# Altium PCB remote.PcbDoc
Units mm, origin at the board's own origin, x right, y up, seen from the top; angles counter-clockwise.
Board outline 152.4 x 101.6 mm, 2 copper layers (Top Layer, Bottom Layer); 38 components, 52 nets, 205 pads, 40 vias.
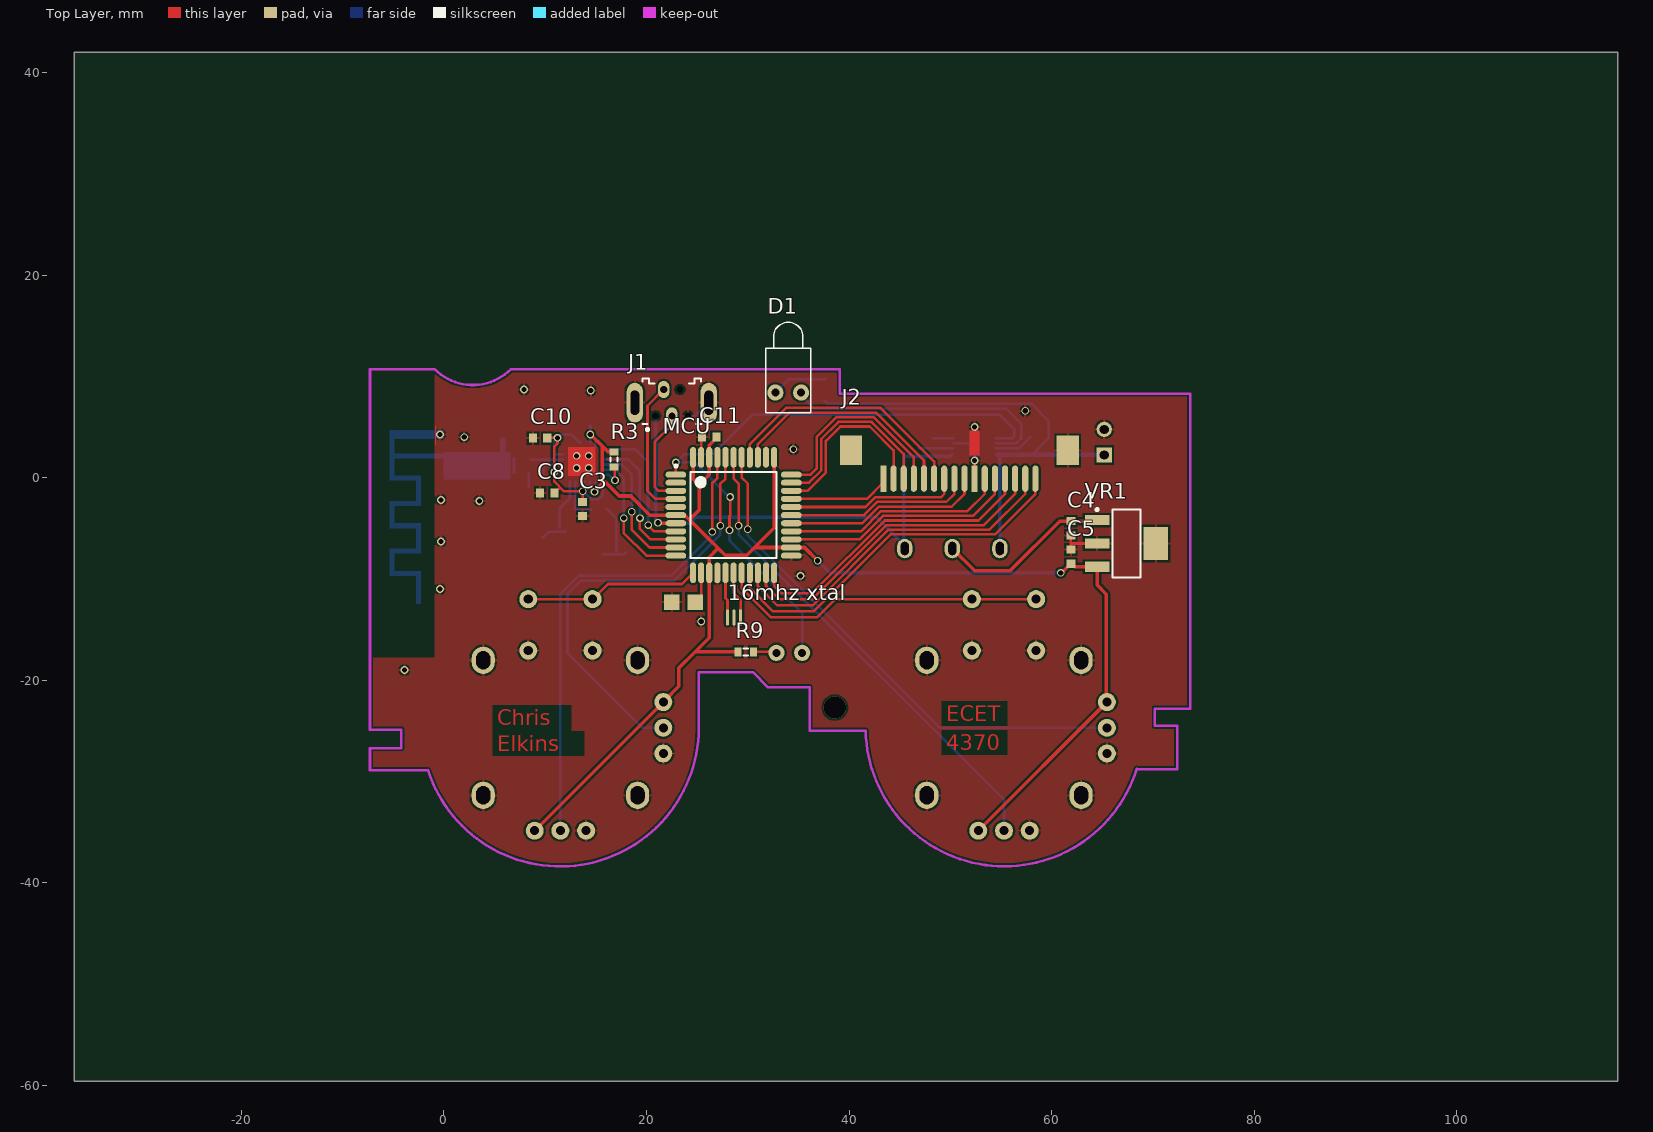
[diagram p0: Top Layer view]
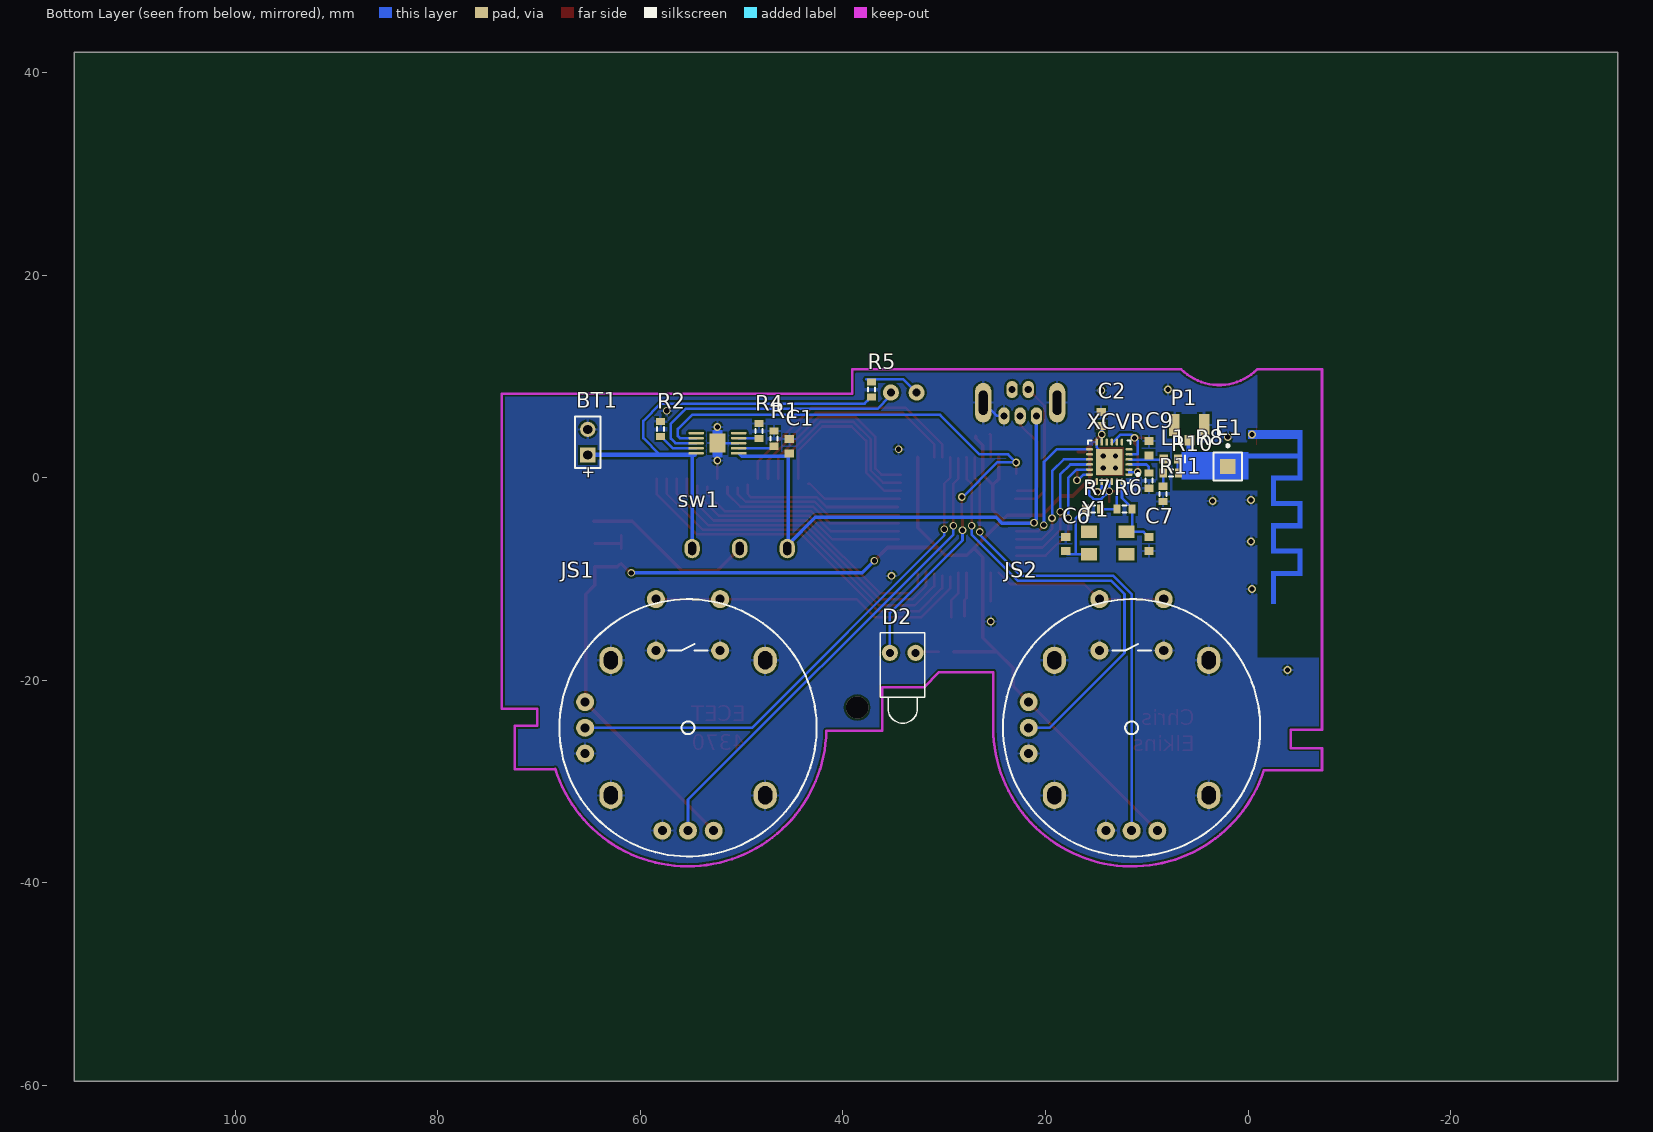
[diagram p1: Bottom Layer view, seen from below]

## Layer stack, top to bottom
Top Layer: signal copper 0.0356
Dielectric: dielectric 0.32, FR-4, Dk 4.8
Bottom Layer: signal copper 0.0356

## Board outline
-36.5,-59.6 115.9,-59.6 115.9,42 -36.5,42

## Design rules (kind name [scope] priority, off if disabled: settings)
Clearance [All] p1: gap=0.2
PolygonConnect [All] p1: connectstyle=Relief reliefconductorwidth=0.254 reliefentries=4 polygonreliefangle="90 Angle"
RoomDefinition U_power [InComponentClass('U_power')] p1: confinementstyle=ConfineOut formatcopy=TRUE lockcomponents=FALSE outline 182.6,31.5 118.4,31.5 118.4,47.1 182.6,47.1
RoomDefinition U_joysticks [InComponentClass('U_joysticks')] p2: confinementstyle=ConfineOut formatcopy=TRUE lockcomponents=FALSE outline -96.8,-37.4 -44.2,-37.4 -44.2,-11.5 -96.8,-11.5
RoomDefinition U_xcvr [InComponentClass('U_xcvr')] p3: confinementstyle=ConfineOut formatcopy=TRUE lockcomponents=FALSE outline 205.9,19.7 119.401,19.7 119.401,27.6 205.9,27.6
RoomDefinition U_mcu [InComponentClass('U_mcu')] p4: confinementstyle=ConfineOut formatcopy=TRUE lockcomponents=FALSE outline 165.7,-32.6 211.3,-32.6 211.3,-15.2 165.7,-15.2
RoomDefinition U_connectors [InComponentClass('U_connectors')] p5: confinementstyle=ConfineOut formatcopy=TRUE lockcomponents=FALSE outline 132.2,-62.6 147.2,-62.6 147.2,-35.9 132.2,-35.9
RoutingVias [All] p1: holewidth=0.711 width=1.27 viastyle="Through Hole" minholewidth=0.711 minwidth=1.27 maxholewidth=0.711 maxwidth=1.27
SilkscreenOverComponentPads [All] p1: minsilkscreentomaskgap=0.254
SolderMaskExpansion [All] p1: expansion=0.102
Width [All] p1: maxlimit=5 minlimit=0.254 preferedwidth=0.254
27 further rules are at their usual default settings.

## Classes and differential pairs
component class U_connectors: J1 J2
component class U_mcu: "16mhz xtal" C11 D2 MCU R9
component class U_power: BT1 C1 C4 C5 chg1 D1 R1 R2 R4 R5 sw1 VR1
component class U_xcvr: C2 C3 C6 C7 C8 C9 C10 E1 L1 P1 R3 R6 R7 R8 R10 R11 XCVR Y1
component class U_joysticks: JS1 JS2 JS?

## Components (designator, comment, footprint, x,y, rotation, side; value= is the part's Value field where it differs from the comment)
"16mhz xtal" "NCSTCE16M0V53-R0" OSC 29.3,-13.8 r180 top
BT1 "Battery" BAT-2 65.2,3.5 r90 bottom
C1 "Cap Semi" CAPC1608L 45.3,3.1 r270 bottom
C2 "Cap Semi" CAPC1608L 14.5,5.8 r270 bottom
C3 "Cap Semi" CAPC1608L 13.7,-3.1 r90 top
C4 "Cap Semi" CAPC1608L 61.9,-5 r90 top
C5 "Cap Semi" CAPC1608L 61.9,-7.8 r270 top
C6 "Cap Semi" CAPC1608L 18,-6.55 r270 bottom
C7 "Cap Semi" CAPC1608L 9.8,-6.55 r90 bottom
C8 "Cap Semi" CAPC1608L 10.2,-1.5 r0 top
C9 "Cap Semi" CAPC1608L 9.8,2.9 r90 bottom
C10 "Cap Semi" CAPC1608L 9.5,3.9 r180 top
C11 "Cap Semi" CAPC1608L 26.2,4 r180 top
D1 "LED1" LED-1 34,8.4 r90 top
D2 "LED1" LED-1 34.1,-17.3 r270 bottom
E1 "Antenna" PIN1 2,1.1 r180 bottom
J1 "5000750517" 5000750517 22.5,7.4 r0 top
J2 "flat flex connector" "flex con" 43.1,-1.4 r0 top
JS1 "joystick" Joystick 55.3,-24.7 r180 bottom
JS2 "joystick" Joystick 11.5,-24.7 r180 bottom
L1 "Inductor" INDC1608L 7.62,1.85 r0 bottom
MCU "ATMega32u4" TQFP44_M 28.6,-3.7 r0 top
P1 "u.fl" "U.FL connector" 5.8,5.2 r180 bottom
R1 "Res3" RESC1608L 46.8,3.85 r270 bottom
R2 "Res3" RESC1608L 58,4.8 r270 bottom
R3 "Res3" RESC1608L 16.8,1.8 r90 top
R4 "Res3" RESC1608L 48.3,4.6 r270 bottom
R5 "Res3" RESC1608L 37.2,8.7 r270 bottom
R6 "Res3" RESC1608L 12.2,-3.1 r180 bottom
R7 "Res3" RESC1608L 15.3,-3.1 r180 bottom
R8 "Res3" RESC1608L 9.8,-0.3 r90 bottom
R9 "Res3" RESC1608L 29.8,-17.2 r0 top
R10 "Res3" RESC1608L 7.62,0.45 r180 bottom
R11 "Res3" RESC1608L 8.4,-1.6 r270 bottom
sw1 "switch" switch 50.2,-7 r90 bottom
VR1 "NCP1117ST33T3G" SOT223-4N 67.4,-6.5 r0 top
XCVR "CYRF8935" QFN50P400X400-24VAL 13.7,1.55 r0 bottom
Y1 "XTAL" PCBComponent_1 15.7,-7.55 r180 bottom

## Footprints (in the part's own frame and the unit in brackets; to place one, negate y for a bottom-side part, rotate by r counter-clockwise, add the part's x,y. Pads: shape width x height; smd on the part's side, far side on the other; paste and mask are expansions set on the pad)
5000750517 [mm] "Connector; USB Mini-B, Type 2, Thru-Hole; 5 Position; Vertical"
  round 0.4 / inner round 0.4 / far side oval 1.1x1.7 hole 0.7: 1(-1.6,-1.3) 4(0.8,1.3) 5(1.6,-1.3)
  oval 1.1x1.7 / inner round 0.4 / far side oval 1.1x1.7 hole 0.7: 2(-0.8,1.3) 3(0,-1.3)
  oval 1.6x3.9 / inner oval 0.55x2.1 / far side oval 1.6x3.9 hole 0.85 slot 2.4 at 90 deg: 6(3.65,0) 7(-3.65,0)
  silkscreen extent -2.91,-2.77 2.91,2.4, body extent -3.85,-2.1 3.85,2.4, height 7.7
BAT-2 [mm] "Multicell Battery; 2 Leads"
  rect 1.5x1.5 hole 0.9: 1(-1.27,0)
  round 1.5 hole 0.9: 2(1.27,0)
  silkscreen extent -2.54,-1.27 2.54,1.27
CAPC1608L [mm] "Chip Capacitor, Body 1.6x0.8mm, IPC High Density"
  rect 0.8x0.9 smd: 1(-0.7,0) 2(0.7,0)
  body extent -0.87,-0.48 0.87,0.48, height 1.3
"flex con" [mm]
  rect 2.2x2.9 smd: 0(-2.9,4.1) 0(18.5,4.1)
  rect 0.6x2.6 smd: 1(0.3,1.3) 10(9.3,1.3)
  oval 0.6x2.6 smd: 2(1.3,1.3) 3(2.3,1.3) 4(3.3,1.3) 5(4.3,1.3) 6(5.3,1.3) 7(6.3,1.3) 8(7.3,1.3) 9(8.3,1.3) 11(10.3,1.3) 12(11.3,1.3) 13(12.3,1.3) 14(13.3,1.3) 15(14.3,1.3) 16(15.3,1.3)
INDC1608L [mm] "Chip Inductor, Body 1.6x0.8mm, IPC High Density"
  rect 0.8x0.9 smd: 1(-0.7,0) 2(0.7,0)
  silkscreen extent -1.4,-0.35 -1.4,0.35, body extent -0.87,-0.48 0.87,0.48, height 0.55
Joystick [mil]
  round 70 hole 35.43: B1A(-125,500) B1B(125,500) B2A(-125,300) B2B(125,300)
  round 70 hole 35: H1(-100,-400) H2(0,-400) H3(100,-400) V1(-400,100) V2(-400,0) V3(-400,-100)
  oval 90x105.75 hole 55 slot 70.87 at 90 deg: MOUNT1(-300,262.5) MOUNT2(-300,-262.5) MOUNT3(300,-262.5) MOUNT4(300,262.5)
  silkscreen extent -500,-500 500,500
LED-1 [mm] "Typical RED GaAs LED; 2 Leads"
  round 1.6 hole 0.8: 1(0,1.27) 2(0,-1.27)
  silkscreen extent -2,-2.2 6.95,2.2
OSC [mm]
  rect 0.3x1.6 smd: 1(0,0)
  oval 0.3x1.6 smd: 2(0.65,0) 3(1.3,0)
PCBComponent_1 [mm]
  rect 1.6x1.25 smd: 1(0,0) 2(3.7,2.2) 3(0,2.2) 3(3.7,0)
PIN1 [mm] "Generic Antenna; 1 Lead"
  rect 1.5x1.5 smd paste-10: 1(0,0)
  silkscreen extent -1.4,-1.4 1.4,2.17
QFN50P400X400-24VAL [mm] "24-Pin Plastic Quad Flat No-Lead 0.5 mm Pitch"
  oval 0.7x0.25 smd: 1(-1.95,1.25) 2(-1.95,0.75) 3(-1.95,0.25) 4(-1.95,-0.25) 5(-1.95,-0.75) 6(-1.95,-1.25) 13(1.95,-1.25) 14(1.95,-0.75) 15(1.95,-0.25) 16(1.95,0.25) 17(1.95,0.75) 18(1.95,1.25)
  oval 0.25x0.7 smd: 7(-1.25,-1.95) 8(-0.75,-1.95) 9(-0.25,-1.95) 10(0.25,-1.95) 11(0.75,-1.95) 12(1.25,-1.95) 19(1.25,1.95) 20(0.75,1.95) 21(0.25,1.95) 22(-0.25,1.95) 23(-0.75,1.95) 24(-1.25,1.95)
  rect 2.6x2.6 smd: 25(0,0)
  silkscreen extent -2.97,-2.1 2.1,2.1, body extent -2.07,-2.07 2.07,2.07, height 1
RESC1608L [mm] "Chip Resistor, Body 1.6x0.8mm, IPC High Density"
  rect 0.7x0.9 smd: 1(-0.75,0) 2(0.75,0)
  silkscreen extent -0.2,-0.35 0.2,0.35, body extent -0.85,-0.48 0.85,0.48, height 0.9
SOT223-4N [mm] "SOT223, 4-Leads, Body 6.5x3.5mm, Pitch 2.3mm, Lead Span 7mm, IPC Medium Density"
  rect 2.4x1 smd: 1(-2.9,2.3) 2(-2.9,0) 3(-2.9,-2.3)
  rect 2.4x3.3 smd: 4(2.9,0)
  silkscreen extent -3.02,-3.35 1.4,3.47, body extent -1.85,-3.35 1.85,3.35, height 1.7
switch [mil]
  oval 75.75x60 hole 30.79 slot 51.18 at 0 deg: 1(0,185.04) 2(0,0) 3(0,-185.04)
  body extent -130,-250 130,250, height 309
TQFP44_M [mm] "Thin QFP, 44-Leads, Body 10x10mm, Pitch 0.8mm, IPC Low Density"
  oval 2.05x0.6 smd: 1(-5.7,4) 2(-5.7,3.2) 3(-5.7,2.4) 4(-5.7,1.6) 5(-5.7,0.8) 6(-5.7,0) 7(-5.7,-0.8) 8(-5.7,-1.6) 9(-5.7,-2.4) 10(-5.7,-3.2) 11(-5.7,-4) 23(5.7,-4) 24(5.7,-3.2) 25(5.7,-2.4) 26(5.7,-1.6) 27(5.7,-0.8) 28(5.7,0) 29(5.7,0.8) 30(5.7,1.6) 31(5.7,2.4) 32(5.7,3.2) 33(5.7,4)
  oval 0.6x2.05 smd: 12(-4,-5.7) 13(-3.2,-5.7) 14(-2.4,-5.7) 15(-1.6,-5.7) 16(-0.8,-5.7) 17(0,-5.7) 18(0.8,-5.7) 19(1.6,-5.7) 20(2.4,-5.7) 21(3.2,-5.7) 22(4,-5.7) 34(4,5.7) 35(3.2,5.7) 36(2.4,5.7) 37(1.6,5.7) 38(0.8,5.7) 39(0,5.7) 40(-0.8,5.7) 41(-1.6,5.7) 42(-2.4,5.7) 43(-3.2,5.7) 44(-4,5.7)
  silkscreen extent -5.82,-4.25 4.25,4.97, body extent -5,-5 5,5, height 1.6
"U.FL connector" [mm] "u.fl smd connector"
  rect 1x1.05 smd: 1(0,-1.525)
  rect 1.05x2.2 smd: 2(-1.475,0) 2(1.475,0)

## Part data
BT1: "Multicell Battery"
C1 C2 C3 C4 C5 C6 C7 C8 C9 C10 C11: "Capacitor (Semiconductor SIM Model)"
D1 D2: "Typical RED GaAs LED"
E1: "Generic Antenna"
J1: "USB On-The-Go (OTG) Mini-B Receptacle, Right Angle, Thru-Hole, 0.80mm (.031\") Pitch, Solder Tails & Shell Tabs with Dimples"
MCU: "usb enabled avr microcontroller"
P1: library part BNC, "BNC Elbow Connector"
R1 R2 R3 R4 R5 R6 R7 R8 R9 R10 R11: "Resistor"
VR1: library part "Volt Reg", "Voltage Regulator"
Y1: "Crystal Oscillator"

## Free pads (board coordinates)
  rect 1.524x1.524 smd: 0(24.8,-12.3) 1(22.5,-12.3)
  rect 1.57x1.88 smd far side: 0(52.4,3.4)
  rect 1.55x0.25 smd far side: 1(50.3,2.4)
  oval 1.55x0.25 smd far side: 2(50.3,2.9) 3(50.3,3.4) 4(50.3,3.9) 5(50.3,4.4) 6(54.5,4.4) 7(54.5,3.9) 8(54.5,3.4) 9(54.5,2.9) 10(54.5,2.4)

## Via types
v1: diameter 0.762, hole 0.508, Top Layer to Bottom Layer, 35 vias
v2: diameter 0.762, hole 0.508, Top Layer to Bottom Layer, tented top, 4 vias
v3: diameter 2.2, hole 2.2, Top Layer to Bottom Layer, 1 vias

## Nets (pads, with @x,y where several pads share a name; then routed paths per layer and width w, separated by ;. In a path a pad name is that pad's centre, name@x,y a point inside that pad or via, vN(x,y) a via of type N, cw(c..) or ccw(c..) an arc to the next point about the centre after c; other vN are vias at no path point)
GND: "16mhz xtal.2" BT1.2 C1.1 C2.1 C3.1 C4.1 C5.1 C6.1 C7.1 C8.1 C9.2 C10.2 C11.2 J1.5 J1.6 J1.7 J2.0@61.6,2.7 J2.10 JS1.B2A JS1.B2B JS1.H1 JS1.MOUNT1 JS1.MOUNT2 JS1.MOUNT3 JS1.MOUNT4 JS1.V3 JS2.B2A JS2.B2B JS2.H1 JS2.MOUNT1 JS2.MOUNT2 JS2.MOUNT3 JS2.MOUNT4 JS2.V3 MCU.5 MCU.15 MCU.23 MCU.35 MCU.43 P1.2 pad.0@52.4,3.4 pad.1@22.5,-12.3 pad.3 R1.1 R2.1 R4.1 R8.1 R11.2 VR1.2 VR1.4 XCVR.12 XCVR.25 | length 13.4
  Top Layer w0.254: MCU.43 25.4,4.2 C11.2@25.5,4.3 ; J2.10 v1(52.4,1.7) ; C5.1@61.9,-7 C4.1 ; 61.9,-6.5 VR1.2
  Bottom Layer w0.254: XCVR.25@14.65,2.7 14.95,3 XCVR.12 ; J1.5 24.8,6.1 J1.6@26.1,7.4 ; pad.3 pad.0@52.2,3.4
  other v1: -3.9,-19 25.4,-14.2 -0.4,-11 35.2,-9.7 -0.3,-6.3 3.5,-2.3 -0.3,-2.2 34.5,2.8 2,4 -0.39,4.25 52.4,5 57.4,6.6 14.5,8.6 7.9,8.7
  other v2: 13.1,0.95 14.3,0.95 13.1,2.15 14.3,2.15
"Net16mhz xtal_1": "16mhz xtal.1" MCU.17 | length 4.7
  Top Layer w0.254: MCU.17 28.6,-11.4 29.3,-12.1 29.3,-13.8
"Net16mhz xtal_3": "16mhz xtal.3" MCU.16 | length 4.4
  Top Layer w0.254: MCU.16 27.8,-11.9 28,-12.1 28,-13.7
NetC4_2: C4.2 sw1.2 VR1.1 | length 17.3
  Top Layer w0.354: sw1.2 52.4,-9.2 55.9,-9.2 60.8,-4.3 C4.2 VR1.1@64.6,-4.3
NetC6_2: C6.2 R7.1 Y1.1 | length 7.2
  Bottom Layer w0.254: Y1.1 17,-7.55 ; R7.1@16.1,-3.1 17,-4 17,-7.55 ; C6.2@18,-7.4 17.85,-7.55 17,-7.55
NetC7_2: C7.2 R6.2 XCVR.24 Y1.2 | length 7.3
  Bottom Layer w0.254: C7.2@9.77,-5.9 10.32,-5.35 Y1.2 ; Y1.2@11.45,-4.95 R6.2 ; R6.2@11.45,-3 12.45,-2 XCVR.24
NetC9_1: C9.1 L1.2 XCVR.4 | length 3.2
  Bottom Layer w0.254: L1.2@8.567,1.783 11.733,1.783 XCVR.4
Netchg1_2: pad.2 R1.2 | length 3.4
  Bottom Layer w0.254: R1.2@46.9,2.9 pad.2
Netchg1_4: pad.4 R4.2 | length 2
  Bottom Layer w0.254: R4.2@48.3,3.9 pad.4
Netchg1_7: D2.2 MCU.1 pad.7 | length 64.7
  Top Layer w0.254: MCU.1@22.9,0.4 v1(22.9,1.5) ; v1(28.2,-5.2) 28.2,-3.8 28.26,-3.74 v1(28.26,-1.92)
  Bottom Layer w0.254: v1(22.9,1.5) 24.77,1.5 28.26,-1.99 v1(28.26,-1.92) ; v1@23,1.6 23.7,2.3 26.5,2.3 30.4,6.2 54.9,6.2 56.3,4.8 56.3,4.1 56.1,3.9 pad.7 ; v1(28.2,-5.2) 28.2,-6.19 35.37,-13.36 D2.2
Netchg1_8: D1.2 pad.8 | length 26.9
  Bottom Layer w0.254: D1.2@35.4,8 36.6,6.8 55.538,6.8 57,5.338 57,3.854 56.546,3.4 pad.8
Netchg1_9: pad.9 R2.2 | length 3.9
  Bottom Layer w0.254: pad.9 56.8,2.9 R2.2@57.9,4
NetD1_1: D1.1 R5.1 | length 5.5
  Bottom Layer w0.254: D1.1 34.03,9.7 37.7,9.7
NetD2_1: D2.1 R9.2 | length 2.3
  Top Layer w0.254: R9.2 D2.1@32.8,-17.2
NetE1_1: E1.1 L1.1 P1.1 R10.2 | length 3.2
  Bottom Layer w0.254: R10.2@6.92,0.5 L1.1
  Bottom Layer w0.554: 5.8,1.8 P1.1
NetJ1_2: J1.2 MCU.4 | length 13.9
  Top Layer w0.254: J1.2 20.1,7.1 20.1,-1.3 20.9,-2.1 MCU.4@23,-2.1
NetJ1_3: J1.3 MCU.3 | length 9.9
  Top Layer w0.254: J1.3 22.5,5.2 20.8,3.5 20.8,-0.9 21.2,-1.3 MCU.3@22.8,-1.3
NetJ2_1: J2.1 MCU.30 | length 9.6
  Top Layer w0.254: MCU.30@34.4,-2.1 41.781,-2.1 43.281,-0.6 J2.1@43.4,-0.6
NetJ2_2: J2.2 MCU.31 | length 18.3
  Top Layer w0.254: MCU.31 35.893,-1.3 37.714,0.521 37.714,3.621 39.147,5.053 42.047,5.053 44.4,2.7 J2.2
NetJ2_3: J2.3 MCU.32 | length 19.2
  Top Layer w0.254: MCU.32 36.047,-0.5 37.257,0.711 37.257,3.811 38.957,5.511 42.236,5.511 45.4,2.347 J2.3
NetJ2_4: J2.4 MCU.33 | length 20
  Top Layer w0.254: MCU.33 36.2,0.3 36.8,0.9 36.8,4 38.768,5.968 42.425,5.968 46.4,1.993 J2.4
NetJ2_5: J2.5 MCU.36 | length 22.8
  Top Layer w0.254: MCU.36 31,3.3 34.125,6.425 42.675,6.425 47.4,1.7 J2.5
NetJ2_6: J2.6 MCU.37 | length 24.9
  Top Layer w0.254: MCU.37 30.2,3.3 33.782,6.882 43.118,6.882 48.4,1.6 J2.6
NetJ2_7: J2.7 MCU.29 | length 16.2
  Top Layer w0.254: MCU.29@34.6,-2.9 41.627,-2.9 42.585,-1.942 49.058,-1.942 49.4,-1.6 J2.7@49.4,-0.7
NetJ2_8: J2.8 MCU.28 | length 17.4
  Top Layer w0.254: MCU.28@34.5,-3.7 41.474,-3.7 42.774,-2.4 49.6,-2.4 50.4,-1.6 J2.8@50.4,-1
NetJ2_9: J2.9 MCU.27 | length 18.8
  Top Layer w0.254: MCU.27@34.5,-4.5 41.321,-4.5 42.964,-2.857 50.143,-2.857 51.4,-1.6 J2.9@51.4,-0.9
NetJ2_11: J2.11 MCU.26 | length 21.1
  Top Layer w0.254: MCU.26@34.5,-5.3 41.167,-5.3 43.153,-3.314 51.686,-3.314 53.4,-1.6 J2.11@53.4,-0.9
NetJ2_12: J2.12 MCU.25 | length 22.6
  Top Layer w0.254: MCU.25@34.5,-6.1 41.014,-6.1 43.342,-3.771 52.229,-3.771 54.4,-1.6 J2.12@54.4,-0.8
NetJ2_13: J2.13 MCU.22 | length 29.8
  Top Layer w0.254: MCU.22@32.6,-9.5 32.6,-10.7 33.3,-11.4 36.36,-11.4 43.532,-4.228 52.772,-4.228 55.4,-1.6 J2.13
NetJ2_14: J2.14 MCU.21 | length 32.3
  Top Layer w0.254: MCU.21@31.8,-9.3 31.8,-10.7 33.1,-12 36.407,-12 43.721,-4.686 53.314,-4.686 56.4,-1.6 ; 56.4,-1.6 J2.14
NetJ2_15: J2.15 MCU.20 | length 34.4
  Top Layer w0.254: MCU.20@31,-9.5 31,-10.7 32.9,-12.6 36.453,-12.6 43.911,-5.143 53.857,-5.143 57.4,-1.6 J2.15
NetJ2_16: J2.16 MCU.19 | length 36.7
  Top Layer w0.254: MCU.19@30.2,-9.7 30.2,-10.9 32.5,-13.2 36.5,-13.2 44.1,-5.6 54.4,-5.6 58.4,-1.6 J2.16
NetJS1_B1A: JS1.B1A JS1.B1B MCU.18 | length 32.1
  Top Layer w0.254: MCU.18@29.4,-9.8 29.4,-10.9 32.3,-13.8 36.847,-13.8 38.647,-12 JS1.B1B@52.1,-12 ; JS1.B1B JS1.B1A JS1.B1A@58.5,-12
NetJS1_H2: JS1.H2 MCU.39 | length 47.9
  Top Layer w0.254: MCU.39@28.6,1.9 28.6,-0.1 29.1,-0.6 v1@29.1,-4.73
  Bottom Layer w0.254: v1@29.1,-4.73 29.1,-5.6 55.3,-31.8 JS1.H2 JS1.H2@55.3,-34.9
  other v1: 29.1,-4.75
NetJS1_V2: JS1.V2 MCU.38 | length 51.3
  Top Layer w0.254: MCU.38 29.4,0 30,-0.6 v1@30,-5.2
  Bottom Layer w0.254: v1@30,-5.29 30,-5.7 49,-24.7 49.3,-24.7 ; 49.2,-24.7 49.3,-24.7 ; JS1.V2 52.1,-24.7 49.3,-24.7
  other v1: 30,-5.1
NetJS2_B1A: JS2.B1A JS2.B1B MCU.12 | length 17.4
  Top Layer w0.254: JS2.B1B JS2.B1A 14.7,-12 16.2,-10.5 23.5,-10.5 MCU.12
NetJS2_H2: JS2.H2 MCU.41 | length 48.7
  Top Layer w0.254: v1@26.5,-5.11 26.5,-0.52 27,-0.02 MCU.41
  Bottom Layer w0.254: JS2.H2@11.5,-34.6 11.5,-11.5 13.3,-9.7 22.4,-9.7 26.5,-5.6 26.5,-5.1 26.44,-5.16 26.44,-5.25 26.5,-5.31 v1(26.5,-5.35)
NetJS2_V2: JS2.V2 MCU.40 | length 43.8
  Top Layer w0.254: v1@27.3,-4.76 27.3,-0.6 27.78,-0.12 27.78,1.98 MCU.40
  Bottom Layer w0.254: 17.9,-10.2 17.8,-10.2 ; JS2.V2 19.6,-24.7 12.2,-17.3 12.2,-11.5 13.5,-10.2 17.8,-10.2 ; v1(27.295,-4.745) 27.3,-4.75 27.3,-5.6 22.7,-10.2 17.8,-10.2
NetMCU_8: MCU.8 XCVR.13 | length 14.3
  Top Layer w0.254: v1@20.15,-4.7 20.75,-5.3 MCU.8
  Bottom Layer w0.254: XCVR.13 18.9,2.8 20.15,1.55 v1@20.15,-4.69
  other v1: 20.17,-4.69
NetMCU_9: MCU.9 XCVR.15 | length 13.9
  Top Layer w0.254: v1(19.35,-4) 19.35,-5.05 20.4,-6.1 MCU.9
  Bottom Layer w0.254: XCVR.15 18.2,1.8 19.35,0.65 v1(19.35,-4)
NetMCU_10: MCU.10 XCVR.16 | length 13.8
  Top Layer w0.254: v1(18.55,-3.37) 18.55,-5.15 20.3,-6.9 MCU.10
  Bottom Layer w0.254: XCVR.16 17.55,1.3 18.55,0.3 v1@18.55,-3.38
NetMCU_11: MCU.11 XCVR.17 | length 14
  Top Layer w0.254: v1(17.75,-4) 17.75,-5.45 20,-7.7 MCU.11
  Bottom Layer w0.254: XCVR.17 16.95,0.8 17.75,0 v1(17.75,-4)
NetR3_1: R3.1 XCVR.18 | length 2.2
  Top Layer w0.254: v1@16.88,0.01 R3.1@16.88,0.81
  Bottom Layer w0.254: XCVR.18 16.27,0.3 v1@16.83,-0.26
  other v1: 16.88,-0.26
NetR6_1: R6.1 R7.2 XCVR.23 | length 4.3
  Bottom Layer w0.254: R6.1@12.9,-3.1 R6.1 ; XCVR.23 R6.1 ; R7.2 R6.1
NetR8_2: R8.2 XCVR.3 | length 2.7
  Bottom Layer w0.254: R8.2@9.8,0.4 9.8,1.05 10.05,1.3 XCVR.3
NetR10_1: R10.1 R11.1 | length 1.3
  Bottom Layer w0.254: R11.1@8.37,-0.9 R10.1
NewNet1: MCU.13 pad.0@24.8,-12.3 | length 2.8
  Top Layer w0.254: pad.0@25.4,-12.2 MCU.13
NewNet2: 
VBAT: BT1.1 pad.10 R5.2 sw1.1 | length 46.9
  Bottom Layer w0.254: R5.2@37.56,7.61 37.87,7.3 58,7.3 59.7,5.6 59.7,3.9 58.1,2.3 ; 54.627,2.273 54.9,2
  Bottom Layer w0.354: sw1.1 54.9,2
  Bottom Layer w0.454: 54.627,2.273 BT1.1@65.2,2.273
VCC: C2.2 C5.2 C11.1 JS1.H3 JS1.V1 JS2.H3 JS2.V1 MCU.6 MCU.14 MCU.24 MCU.34 MCU.42 MCU.44 R3.2 R9.1 VR1.3 XCVR.11 XCVR.20 | length 156.7
  Top Layer w0.354: JS2.H3 JS2.V1@21.6,-22.22 ; v1@14.5,4.25 15.65,3.1 ; v1@14.88,-1.35 15.65,-0.58 15.65,3.1 ; 15.65,-0.15 17.31,-1.81 18.44,-1.81 20.33,-3.7 MCU.6 23.782,-3.7 24.302,-4.22 24.302,-4.222 25.742,-5.662 25.742,-5.664 26.186,-6.108 26.198,-6.108 27.07,-6.98 ; R3.2@16.75,2.55 16.2,2.55 15.65,3.1 ; JS2.V1@21.8,-22 23.2,-20.6 23.2,-19.4 23.2,-18.8 24.8,-17.2 ; 24.3,-4.1 25.2,-3.2 25.2,-0.7 ; MCU.44 24.6,-0.1 25.2,-0.7 ; MCU.14 26.2,-15.8 24.8,-17.2 ; MCU.14@26.2,-9.3 26.2,-7.85 27,-7.05 27,-7.06 ; C11.1@26.9,4.1 26.9,3.9 26.2,3.2 MCU.42 26.2,0.3 25.2,-0.7 ; 27.11,-7.01 27.77,-7.67 29.89,-7.67 ; R9.1 24.8,-17.2 ; 29.9,-7.67 29.89,-7.67 ; MCU.34 32.6,-4.96 30.68,-6.88 ; MCU.24 35.6,-6.9 v1(36.9,-8.2) ; MCU.24@34.5,-6.9 30.7,-6.9 30.68,-6.88 ; JS1.H3 JS1.V1@65.42,-22.2 ; v1@61,-9.4 C5.2 ; C5.2@62.1,-8.6 62.3,-8.8 VR1.3 64.5,-10.6 65.4,-11.5 JS1.V1@65.4,-22 ; 29.89,-7.67 30.68,-6.88
  Bottom Layer w0.254: XCVR.20 14.45,-1.03 v1@14.88,-1.46 ; XCVR.11 v1(14.45,4.25)
  Bottom Layer w0.354: v1(14.45,4.25) C2.2@14.45,5.05 ; v1(36.9,-8.2) 38.1,-9.4 v1(60.9,-9.4)
  other v1: 14.86,-1.4
VDD: C3.2 C8.2 C10.1 XCVR.1 XCVR.2 XCVR.5 XCVR.8 XCVR.9 XCVR.19 XCVR.21 XCVR.22 | length 22.7
  Top Layer w0.254: C10.1@10.31,3.94 10.32,3.93 v1(11.21,3.93) ; C8.2 10.95,-1.5 11.46,-0.99 ; v1@11.2,3.91 11.21,3.9 11.21,3.37 10.9,3.06 10.9,2.29 ; C3.2@13.7,-2.37 v1(13.7,-1.35) 11.85,-1.35 10.9,-0.4 v1(10.9,0.55) 10.9,2.29 ; 10.9,2.29 10.9,2.3 10.89,2.3 10.9,2.29
  Bottom Layer w0.254: v1(10.9,0.55) 11.5,0.55 XCVR.2 ; 10.9,2.3 10.9,3.65 11.5,4.25 12.6,4.25 13.4,3.45 XCVR.9 ; 10.95,2.3 XCVR.5 ; XCVR.1 XCVR.2@11.75,0.75 ; v1@13.768,-1.35 v1@13.718,-1.35 ; XCVR.21 13.452,-0.4 13.7,-0.648 v1(13.7,-1.35) v1@13.718,-1.35 ; XCVR.19@14.95,-0.479 15.25,-0.779 15.7,-1.229 15.7,-1.709 15.279,-2.13 14.498,-2.13 v1@13.718,-1.35
VUSB: C1.2 J1.1 MCU.7 pad.1@50.3,2.4 sw1.3 | length 56.5
  Top Layer w0.354: v1(21.132,-4.458) 21.132,-4.332 21.3,-4.5 23.73,-4.5 23.748,-4.5 MCU.7
  Bottom Layer w0.354: J1.1 20.9,-4.1 v1@21.3,-4.5 ; pad.1@50.2,2.3 50,2.1 45.4,2.1 45.4,-6.6 42.722,-3.922 24.878,-3.922 24.3,-4.5 ; v1@21.3,-4.5 24.3,-4.5 ; v1@21.3,-4.5 23.73,-4.5 24.3,-4.5
pads on no net: J1.4 J2.0@40.2,2.7 MCU.2 XCVR.6 XCVR.7 XCVR.10 XCVR.14 Y1.3
copper on no net:
  other v3: 38.6,-22.7

## Polygon pours and split planes (outlines as drawn)
GND on Bottom Layer "Top Layer-No Net" (solid, remove dead copper, pour order 1000): -7.9,11.4 -7.4,10.9 76.6,10.9 76.6,-31.5 61.7,-46.4 59.1,-43.8 -9.5,-43.8
GND on Bottom Layer "Top Layer-No Net" (solid, remove dead copper, pour order 1001): 54.9,8.7 54.9,4.4 55.2,4.1 55.4,3.9 60.9,3.9 60.9,9.2 61.1,9.4
GND on Top Layer "Top Layer-No Net" (solid, remove dead copper, pour order 1005): -11.69,14.28 80.02,14.28 82.39,11.91 82.61,11.69 82.61,-41.35 -15.99,-41.35 -16.67,-40.67

## Keep-outs
Keep-Out Layer:
  lines w0.254: -1.6,-28.9 -7.3,-28.9 -7.3,-26.7 -4.2,-26.7 -4.2,-24.9 -7.3,-24.9 -7.3,10.7 -0.9,10.7 ccw(c2.85,14.45) 6.6,10.7 39.1,10.7 39.1,8.3 73.7,8.3 73.7,-22.8 70.2,-22.8 70.2,-24.5 72.4,-24.5 72.4,-28.8 68.4,-28.8 ; -1.565,-28.905 ccw(c11.465,-24.693) 25.158,-24.72 ; 25.15,-24.7 25.15,-19.2 30.5,-19.2 32,-20.7 36.1,-20.7 36.1,-25 41.6,-25 ; 41.64,-24.999 ccw(c55.329,-24.688) 68.406,-28.75

## Other copper
Top Layer:
  rectangle net GND: 51.9,2.19 52.9,4.66
  rectangle net GND: 12.24,0.17 14.97,3.03
  rectangle net GND: -0.9,3.2 -0.77,5.17
  pour cut-out: 32.63,1.31 32.72,1.31 33.72,0.31 33.63,0.22 33.63,-7.7 32.62,-8.71 32.61,-8.7 24.53,-8.7 23.56,-7.73 23.57,-7.72 23.57,0.4 23.6,0.4 24.54,1.34
  text "ECET" at 49.59,-24.06 h1.52
  text "Chris" at 5.28,-24.47 h1.52
  text "4370" at 49.59,-26.93 h1.52
  text "Elkins" at 5.28,-27 h1.52
Bottom Layer:
  rectangle net GND: 51.88,2.01 52.9,4.69
  region net NetE1_1: -2.76,-9.48 -2.76,-12.46 -2.26,-12.46 -2.26,-9.48
  region net NetE1_1: -5.13,-9.2 -5.13,-9.7 -2.26,-9.7 -2.26,-9.2
  region net NetE1_1: -5.11,2.4 -5.11,1.9 0,1.9 0,2.4
  region net NetE1_1: -4.97,4.7 -4.97,3.8 0,3.8 0,4.7
  region net NetE1_1: -5.4,4.7 -5.4,-0.3 -4.9,-0.3 -4.9,4.7
  region net NetE1_1: -5.09,0.2 -5.09,-0.3 -2.26,-0.3 -2.26,0.2
  region net NetE1_1: -2.76,-0.03 -2.76,-2.53 -2.26,-2.53 -2.26,-0.03
  region net NetE1_1: -2.76,-4.8 -2.76,-7.2 -2.26,-7.2 -2.26,-4.8
  region net NetE1_1: -5.05,-7 -5.05,-7.5 -2.26,-7.5 -2.26,-7
  region net NetE1_1: -5.23,-2.3 -5.23,-2.8 -2.26,-2.8 -2.26,-2.3
  region net NetE1_1: -5.12,-4.5 -5.12,-5 -2.26,-5 -2.26,-4.5
  region net NetE1_1: -5.4,-2.3 -5.4,-5 -4.9,-5 -4.9,-2.3
  region net NetE1_1: -5.4,-7 -5.4,-9.7 -4.9,-9.7 -4.9,-7
  rectangle net NetE1_1: -0.02,-0.193 6.58,2.55
  pour cut-out: -0.9,3.5 7.5,3.5 7.5,-1.3 -0.9,-1.3
  pour cut-out: 4.8,6.3 6.9,6.3 6.8,6.2 6.8,4.1 4.8,4.1
Multi-Layer:
  pour cut-out: -7.3,10.7 -0.9,10.7 -0.9,-17.8 -7.3,-17.8

## Text inside footprints (layer, text, board x,y; h text height)
BT1: Bottom Overlay "+" at 64.623,-0.17 h1.15 r270